# Altium PCB 开关电源v0.01.PcbDoc
Units mil, origin at the board's own origin, x right, y up, seen from the top; angles counter-clockwise.
Board outline 3255 x 3475 mil, 2 copper layers (Top Layer, Bottom Layer); 31 components, 25 nets, 86 pads, 0 vias.
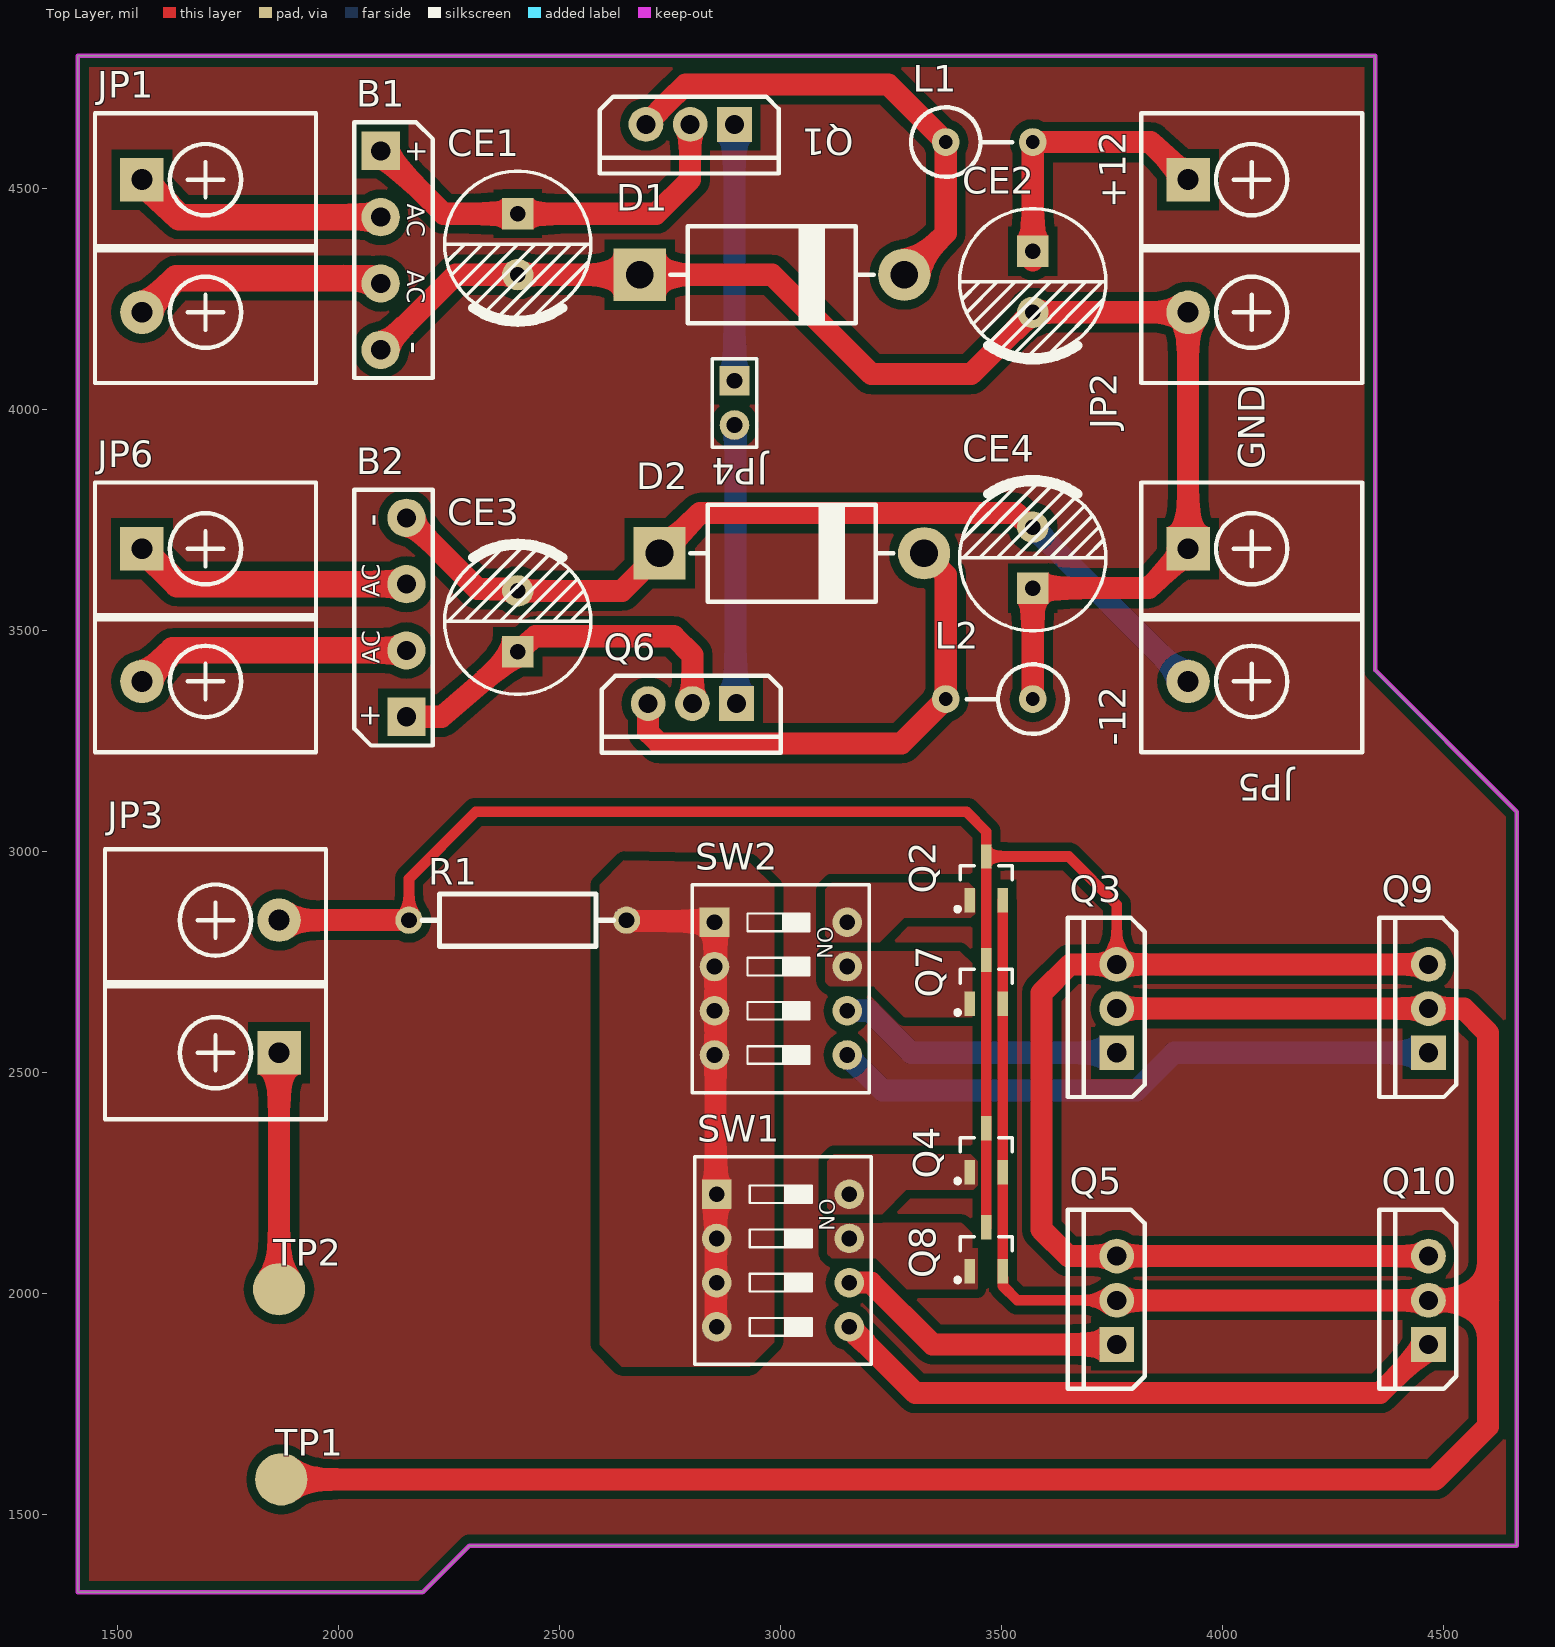
[diagram p0: Top Layer view]
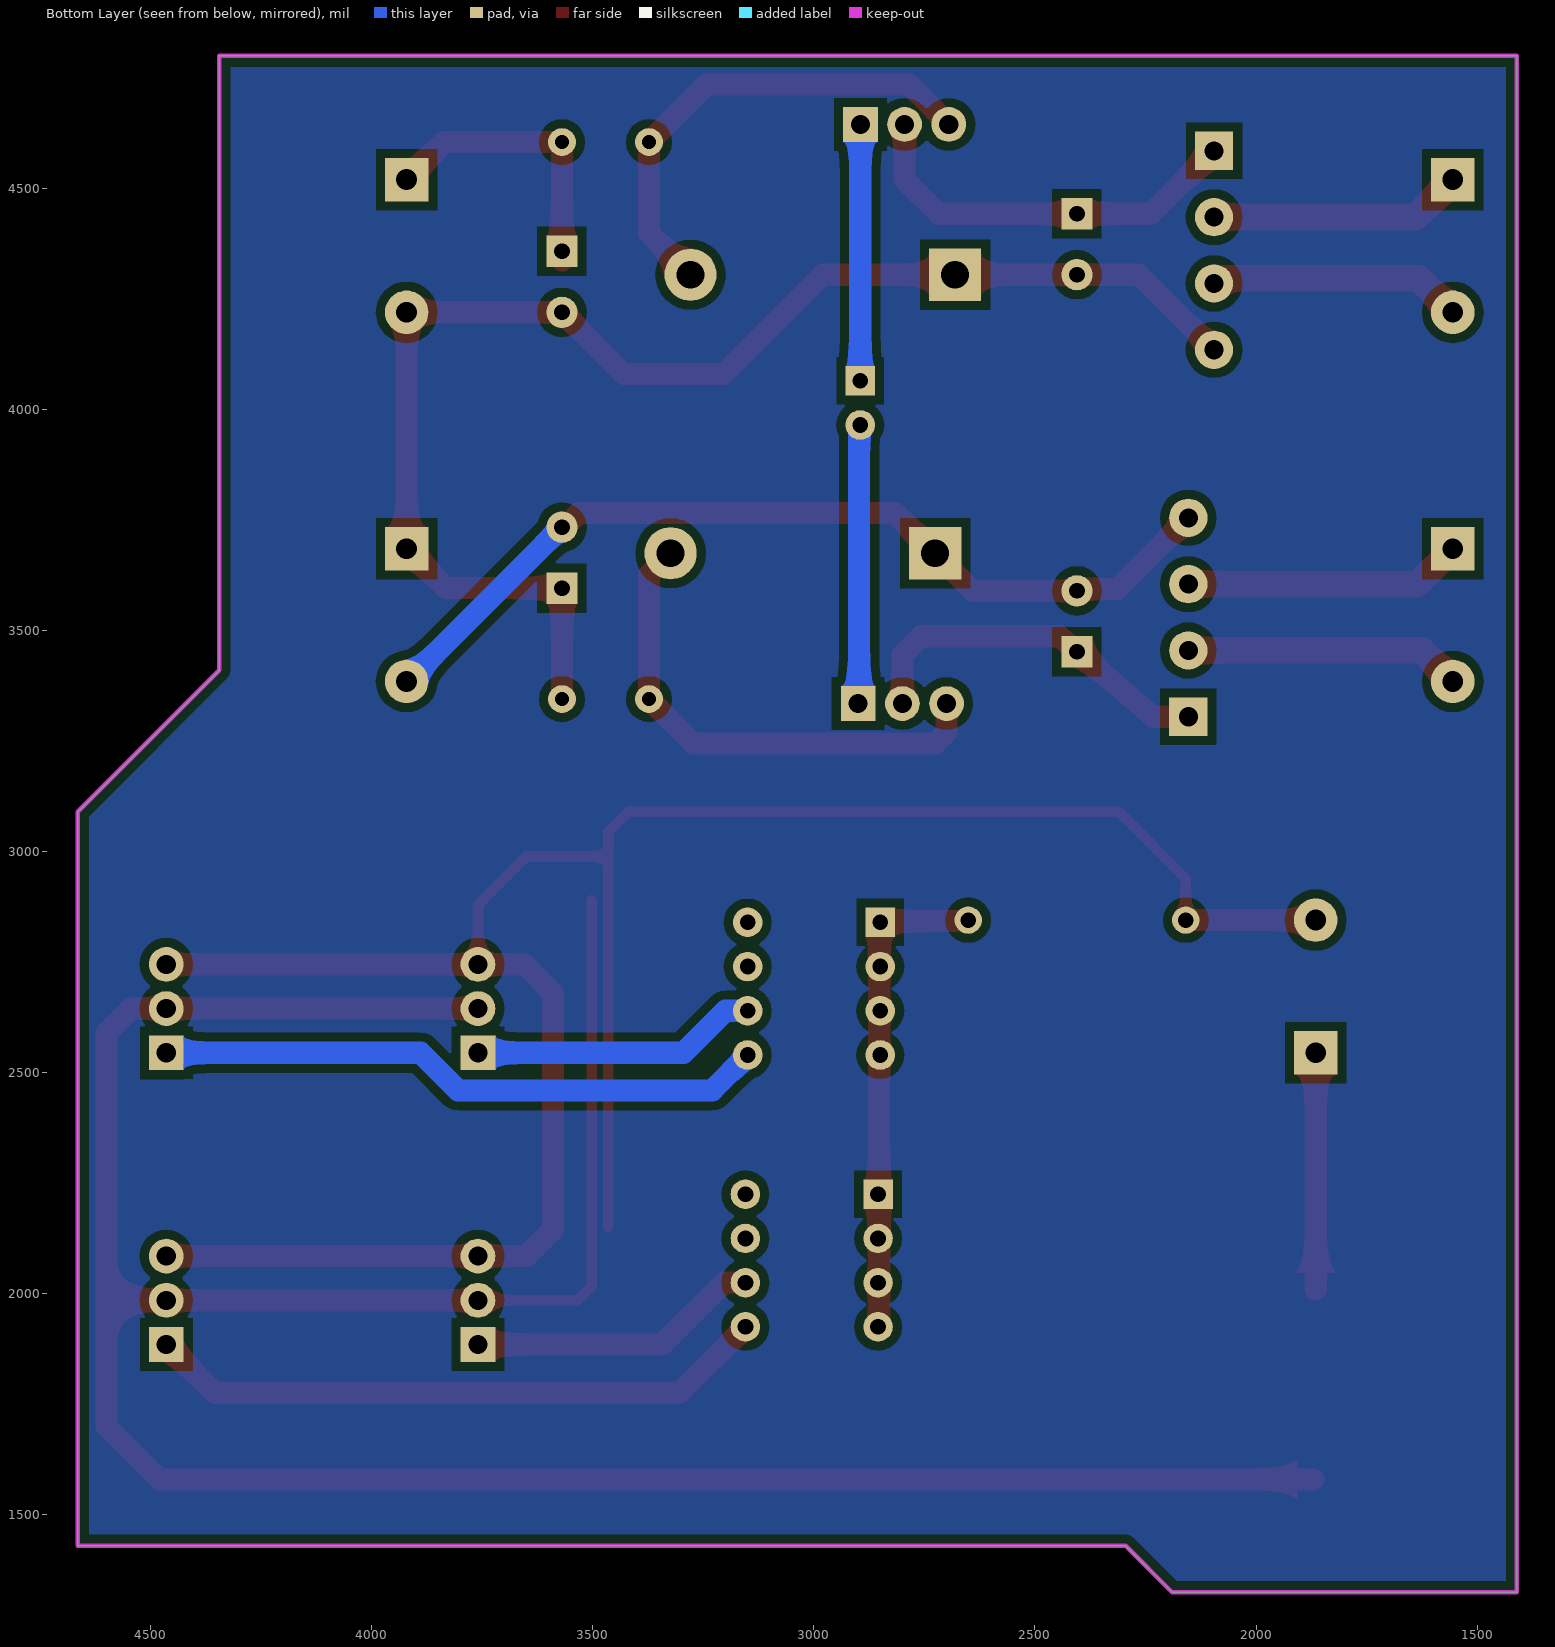
[diagram p1: Bottom Layer view, seen from below]

## Layer stack, top to bottom
Top Solder: solder mask 0.4, Solder Resist, Dk 3.5
Top Layer: signal copper 1.4
Dielectric 1: dielectric 12.6, FR-4, Dk 4.8
Bottom Layer: signal copper 1.4
Bottom Solder: solder mask 0.4, Solder Resist, Dk 3.5

## Board outline
1410,1325 1410,4800 4345,4800 4345,3410 4665,3090 4665,1430 2295,1430 2190,1325

## Design rules (kind name [scope] priority, off if disabled: settings)
Clearance [All] p1: gap=7 ignorepadtopadclearanceinfootprint=FALSE except(20: Arc-Fill Arc-Poly Arc-Region Track-Fill Track-Poly Track-Region SMDPad-Fill SMDPad-Poly SMDPad-Region THPad-Fill THPad-Poly THPad-Region Via-Fill Via-Poly Via-Region Fill-Fill Fill-Poly Fill-Region Poly-Poly Poly-Region Region-Region)
PolygonConnect [All] p1: connectstyle=Direct reliefconductorwidth=10 reliefentries=4 polygonreliefangle="90 Angle" airgapwidth=10
RoutingVias [All] p1: holewidth=28 width=50 viastyle="Through Hole" minholewidth=28 minwidth=50 maxholewidth=28 maxwidth=50
SolderMaskExpansion [All] p1: expansion=4
Width [All] p1: maxlimit=60 minlimit=10 preferedwidth=10
30 further rules are at their usual default settings.

## Components (designator, comment, footprint, x,y, rotation, side; value= is the part's Value field where it differs from the comment)
B1 "KBL608" KBP 2095,4360 r270 top
B2 "KBL608" KBP 2153.11,3530.2 r90 top
CE1 "10uF/16V" "CAP 3.5*8*11.5 - BK" 2405,4373.9 r270 top
CE2 "10uF/16V" "CAP 3.5*8*11.5 - BK" 3570,4288.9 r270 top
CE3 "10uF/16V" "CAP 3.5*8*11.5 - BK" 2405,3521.1 r90 top
CE4 "10uF/16V" "CAP 3.5*8*11.5 - BK" 3570,3665 r90 top
D1 "SS14" DO-201AD 2980,4305 r0 top
D2 "SS14" DO-201AD 3025,3675 r0 top
JP1 "HDR-1X2" KF7620-2P 1698.7,4370 r270 top
JP2 "HDR-1X2" KF7620-2P 4065,4370 r270 top
JP3 "HDR-1X2" KF7620-2P 1721.3,2695 r90 top
JP4 "HDR-1X2" HDR2.54-LI-2P 2895.3,4015 r270 top
JP5 "HDR-1X2" KF7620-2P 4065,3535 r270 top
JP6 "HDR-1X2" KF7620-2P 1698.7,3535 r270 top
L1 "10uH" AL0410_V 3373.15,4605 r0 top
L2 "10uH" AL0410_V 3570,3345 r180 top
Q1 "TIP41C" TO220A 2795,4645 r180 top
Q2 "SI2301" SOT23-3M 3465,2890 r0 top
Q3 "SI2302" TO220A 3760,2645 r90 top
Q4 "IRF840" SOT23-3M 3465,2275 r0 top
Q5 "IRF840" TO220A 3760,1985 r90 top
Q6 "TIP41C" TO220A 2800,3335 r180 top
Q7 "SI2302" SOT23-3M 3465,2656.03 r0 top
Q8 "IRF840" SOT23-3M 3465,2051.03 r0 top
Q9 "SI2302" TO220A 4465,2645 r90 top
Q10 "IRF840" TO220A 4465,1985 r90 top
R1 "1K" "RS 1/2W" 2405,2845 r0 top
SW1 "SW-4P" "CSW DIP-4P" 3005,2075 r270 top
SW2 "SW-4P" "CSW DIP-4P" 3000,2690 r270 top
TP1 "TEST" "TEST 1" 1870,1580 r90 top
TP2 "TEST" "TEST 1" 1865,2010 r90 top

## Footprints (in the part's own frame and the unit in brackets; to place one, negate y for a bottom-side part, rotate by r counter-clockwise, add the part's x,y. Pads: shape width x height; smd on the part's side, far side on the other; paste and mask are expansions set on the pad)
AL0410_V [mm] "5*4*10.5mm（脚距，直径，长度）        淘宝ID:黄晶宝石"
  round 1.6 hole 0.8: 1(0,0) 2(5,0)
  silkscreen extent -2,-2 3.81,2, body extent -2.01,-2.01 5.32,2.01, height 12.39
"CAP 3.5*8*11.5 - BK" [mm] "脚距3.5mm直径8mm高度11.5mm"
  rect 1.8x1.8 hole 0.9: 1(-1.75,0)
  round 1.8 hole 0.9: 2(1.75,0)
  silkscreen extent -4.2,-4.2 4.5,4.2, body extent -4,-4 4.01,4, height 11.54
"CSW DIP-4P" [mm] "11.7*9.9*7mm"
  rect 1.7x1.7 hole 0.9: 1(-3.81,-3.81)
  round 1.7 hole 0.9: 2(-1.27,-3.81) 3(1.27,-3.81) 4(3.81,-3.81) 5(3.81,3.81) 6(1.27,3.81) 7(-1.27,3.81) 8(-3.81,3.81)
  silkscreen extent -5.97,-5.08 5.97,5.08, body extent -5.86,-4.95 5.86,4.95, height 6.65
DO-201AD [mm] "5.2*15.2mm(直径，脚距）"
  rect 3x3 hole 1.6: 1(-7.6,0)
  round 3 hole 1.6: 2(7.6,0)
  silkscreen extent -5.84,-2.79 5.84,2.79, body extent -8.25,-2.6 8.25,2.6, height 5.25
HDR2.54-LI-2P [mm] "封装库来自淘宝卖家 ID：黄晶宝石"
  rect 1.7x1.7 hole 0.9: 1(-1.27,0)
  round 1.7 hole 0.9: 2(1.27,0)
  silkscreen extent -2.54,-1.27 2.54,1.27, body extent -2.54,-1.27 2.54,1.27, height 8.5
KBP [mm] "14.7*4.8*12.2mm(长宽高)"
  round 2.2 hole 1.1: AC1(1.9,0) AC2(-1.91,0) DC-(5.71,0)
  rect 2.2x2.2 hole 1.1: DC+(-5.72,0)
  silkscreen extent -7.37,-1.52 7.33,3, body extent -7.35,-1.25 7.35,2.95, height 11.7
KF7620-2P [mm] "15.2*12*12mm(长宽高)              淘宝ID:黄晶宝石"
  rect 2.5x2.5 hole 1.2: 1(-3.81,-3.65)
  round 2.5 hole 1.2: 2(3.81,-3.65)
  silkscreen extent -7.62,-6.35 7.87,6.35, body extent -7.62,-6.2 8.32,6.2, height 12.45
"RS 1/2W" [mil] "直插色环电阻，脚距12.5mm，直径3mm"
  round 62 hole 35.43: 1(-246.06,0) 2(246.06,0)
  silkscreen extent -217,-59 217,59, body extent -256,-59 256,59, height 122
SOT23-3M [mm] "3x1.3x1mm(长宽高)    封装库来自淘宝卖家 ID：黄晶宝石"
  rect 0.6x1.4 smd: 1(-0.95,0) 2(0.95,0) 3(0,2.514)
  silkscreen extent -1.78,-0.63 1.5,1.97, body extent -1.5,0.07 1.5,2.47, height 1.05
"TEST 1" [mm] "测试点1mm"
  round 3 smd paste-1: 1(0,0)
TO220A [mm] "220，3脚晶体管  封装库来自淘宝卖家 ID：黄晶宝石"
  rect 2x2 hole 1.1: 1(-2.54,0)
  round 2 hole 1.1: 2(0,0) 3(2.54,0)
  silkscreen extent -5.08,-1.6 5.21,2.82, body extent -5.15,-1.53 5.15,2.9, height 18.5

## Part data
B1 B2: library part KBL, "600V/8A整流桥"
CE1 CE2 CE3 CE4: library part CE, "直插电解电容"
D1 D2: "肖特基二极管"
JP1 JP2 JP3 JP4 JP5 JP6: library part "Header 2", "2P接插件"
L1 L2: library part L, "小功率贴片电感"
Q1 Q6: "互补功率-NPN型"
Q2: "P沟道场效应管"
Q3 Q7 Q9: "N沟道场效应管"
Q4 Q5 Q8 Q10: "N沟场效应管"
R1: library part R-S, "色环电阻"
SW1 SW2: "4路编码开关"
TP1 TP2: "测试点"

## Nets (pads, with @x,y where several pads share a name; then routed paths per layer and width w, separated by ;. In a path a pad name is that pad's centre, name@x,y a point inside that pad or via, vN(x,y) a via of type N, cw(c..) or ccw(c..) an arc to the next point about the centre after c; other vN are vias at no path point)
GND: JP3.1 TP2.1 | length 538.5
  Top Layer w50: TP2.1 JP3.1 JP3.1@1867.5,2542.5
NetB1_AC1: B1.AC1 JP1.2 | length 577.2
  Top Layer w60: JP1.2 1632.5,4297.5 2072.79,4297.5 2085.09,4285.2 B1.AC1
NetB1_AC2: B1.AC2 JP1.1 | length 575.1
  Top Layer w60: JP1.1 1639.8,4435.2 B1.AC2
NetB1_DC+: B1.DC+ CE1.1 Q1.2 | length 916
  Top Layer w50: B1.DC+ 2237.4,4442.8 CE1.1 2717.8,4442.8 2795,4520 Q1.2
NetB2_AC1: B2.AC1 JP6.1 | length 631.2
  Top Layer w60: JP6.1 1635,3605 B2.AC1
NetB2_AC2: B2.AC2 JP6.2 | length 627.1
  Top Layer w60: JP6.2 1625,3455 B2.AC2
NetB2_DC+: B2.DC+ CE3.1 Q6.2 | length 833.9
  Top Layer w50: B2.DC+@2166.73,3318.62 2180.35,3305 2232.71,3305 2404.64,3452.62 2444.92,3487.2 2757.8,3487.2 2800,3445 Q6.2
NetB2_DC-: B2.DC- CE3.2 CE4.2 D2.1 JP5.2 | length 2067.3
  Top Layer w50: B2.DC- 2314.12,3593.99 2401.01,3593.99 CE3.2 2640.79,3590 D2.1 2816.84,3766.06 3532.2,3766.06 3564.35,3733.9 CE4.2
  Bottom Layer w50: CE4.2 3571.2,3733.9 3920.1,3385 JP5.2
NetCE2_1: CE2.1 JP2.1 L1.2 | length 653.7
  Top Layer w50: CE2.1@3570,4337.8 L1.2 3836.3,4605 JP2.1
NetD1_2: D1.2 L1.1 Q1.3 | length 1108.7
  Top Layer w50: Q1.3 2723.63,4673.63 2723.63,4674.56 2765.44,4716.37 2766.37,4716.37 2785,4735 3243.15,4735 L1.1 3373.15,4398.94 D1.2
NetD2_2: D2.2 L2.2 Q6.3 | length 1140.2
  Top Layer w50: Q6.3 2700,3270 2725,3245 3273.15,3245 L2.2 3373.15,3626.06 D2.2
NetJP4_1: JP4.1 Q1.1 | length 580.1
  Bottom Layer w50: Q1.1 2895.15,4644.85 2895.15,4065.15 JP4.1
NetJP4_2: JP4.2 Q6.1 | length 631.9
  Bottom Layer w50: JP4.2 2897.65,3962.65 2897.65,3337.35 Q6.1
NetR1_2: R1.2 SW1.1 SW1.2 SW1.3 SW1.4 SW2.1 SW2.2 SW2.3 SW2.4 | length 1118.1
  Top Layer w50: R1.2 2653.36,2842.7 2847.3,2842.7 SW2.1 2852.5,2837.5 2852.5,1927.5 SW1.4
NMOS1: Q4.1 SW1.8
NMOS2: Q8.1 SW1.7
NMOS3: Q5.1 SW1.6 | length 663
  Top Layer w50: SW1.6 3203.58,2025 3343.58,1885 Q5.1
NMOS4: Q10.1 SW1.5 | length 1417.7
  Top Layer w50: SW1.5 3305,1775 4355,1775 Q10.1
PGND: B1.DC- CE1.2 CE2.2 CE4.1 D1.1 JP2.2 JP5.1 L2.1 | length 3222
  Top Layer w50: B1.DC- 2264.8,4305 CE1.2 D1.1 2980,4305 3205,4080 3430,4080 CE2.2 JP2.2 JP5.1 3832.4,3596.1 CE4.1 L2.1
PMOS1: Q2.1 SW2.8
PMOS2: Q7.1 SW2.7
PMOS3: Q3.1 SW2.6 | length 649.4
  Bottom Layer w50: SW2.6 3200,2640 3295,2545 Q3.1
PMOS4: Q9.1 SW2.5 | length 1383.3
  Bottom Layer w50: SW2.5 3230,2460 3805,2460 3890,2545 Q9.1
TGND: Q2.2 Q3.2 Q4.2 Q5.2 Q7.2 Q8.2 Q9.2 Q10.2 TP1.1 | length 6516
  Top Layer w24: Q2.2 Q7.2 Q4.2 Q8.2 3502.4,2035.66 3502.59,2035.47 3502.59,2017.41 3535,1985 Q5.2
  Top Layer w50: TP1.1 4480,1580 4600,1700 4600,1985 ; Q5.2 Q10.2 4600,1985 ; Q3.2 Q9.2 4545,2645 4600,2590 4600,1985
VCC: JP3.2 Q2.3 Q3.3 Q4.3 Q5.3 Q7.3 Q8.3 Q9.3 Q10.3 R1.1 | length 5482.1
  Top Layer w24: R1.1 2158.94,2938.94 2310,3090 3420,3090 3464.82,3045.18 3464.82,3004.53 3465,3004.34 Q2.3 ; Q8.3 Q4.3 Q7.3 Q2.3 ; Q3.3 3760,2880 3651.03,2988.97 Q2.3
  Top Layer w50: JP3.2 R1.1 ; Q10.3 Q5.3 3650,2085 3590,2145 3590,2680 3655,2745 Q3.3 Q9.3

## Polygon pours and split planes (outlines as drawn)
no net on Top Layer (solid, pour order 36): 1410,4800 1410,1325 2190,1325 2295,1430 4665,1430 4665,3090 4345,3410 4345,4800
NetR1_2 on Top Layer (solid, remove dead copper, pour order 20): 2645,2980 2590,2925 2590,1885 2640,1835 2930,1835 2985,1890 2985,2920 2930.09,2974.91
NMOS2 on Top Layer (solid, remove dead copper, pour order 34): 3410,2160 3445,2125 3445,2010 3285,2010 3215,2080 3115,2080 3105,2090 3105,2150 3115,2160
NMOS1 on Top Layer (solid, remove dead copper, pour order 32): 3445,2300 3430,2315 3120,2315 3105,2300 3105,2195 3120,2180 3229.21,2180 3284.21,2235 3435,2235 3445,2245
PMOS2 on Top Layer (solid, remove dead copper, pour order 24): 3405,2775 3440,2740 3440,2625 3280,2625 3210,2695 3110,2695 3100,2705 3100,2765 3110,2775
PMOS1 on Top Layer (solid, remove dead copper, pour order 22): 3440,2915 3425,2930 3115,2930 3100,2915 3100,2810 3115,2795 3224.21,2795 3279.21,2850 3430,2850 3440,2860
no net on Bottom Layer (solid, pour order 38): 1410,4800 1410,1325 2190,1325 2295,1430 4665,1430 4665,3090 4345,3410 4345,4800

## Keep-outs
Keep-Out Layer:
  the board outline again, w10

## Silkscreen, mask and mechanical layers (free items; w line width, h text height)
Top Overlay:
  text "+12" at 3780,4455 h60 r90
  text "GND" at 4095,3865 h60 r90
  text "-12" at 3780,3240 h60 r90
Mechanical 1:
  the board outline again, w10

## Text inside footprints (layer, text, board x,y; h text height)
B1: Top Overlay "+" at 2155,4610 h47.24 r270; Top Overlay "-" at 2145,4155 h59.06 r270; Top Overlay "AC" at 2155,4465.2 h39.37 r270; Top Overlay "AC" at 2155,4315.2 h39.37 r270
B2: Top Overlay "+" at 2093.11,3280.2 h47.24 r90; Top Overlay "-" at 2103.11,3735.2 h59.06 r90; Top Overlay "AC" at 2093.11,3425 h39.37 r90; Top Overlay "AC" at 2093.11,3575 h39.37 r90
SW1: Top Overlay "ON" at 3075,2215 h60 r270
SW2: Top Overlay "ON" at 3070,2830 h60 r270